# EAGLE board promini_layout (EAGLE 6.5.0)
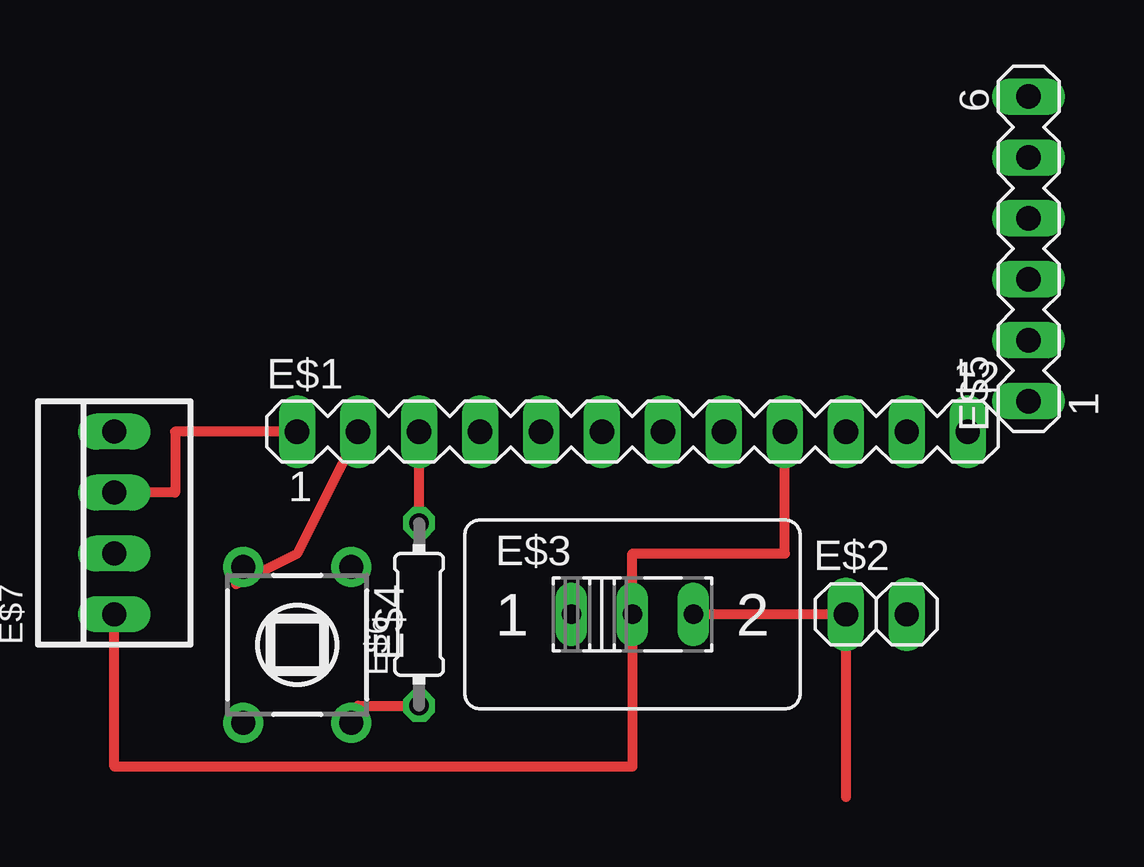
[diagram p0: board, top side]
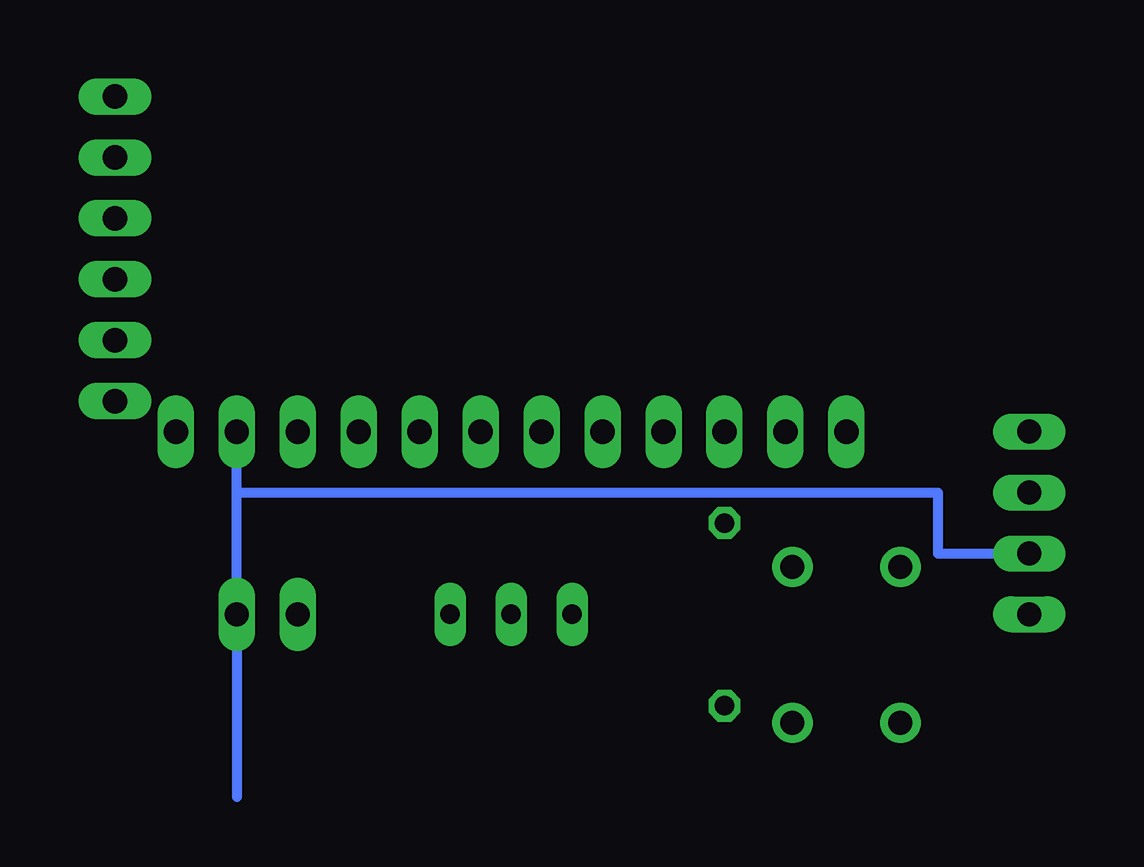
[diagram p1: board, bottom side, seen from below]

No outline drawn. Coordinates in mm, seen from the top.
Copper layers (1*16): Top 0.035mm / dielectric 1.5mm / Bottom 0.035mm
Design rules "default": minimum track width 10mil, minimum drill 24mil, track to track 8mil, track to pad 8mil, pad to pad 8mil, via to via 8mil, smd to smd 8mil, copper to edge 40mil, drill to drill 8mil, minimum pad ring 10mil, minimum via ring 8mil, stop-mask expansion 4mil, vias tented up to drill 0mil, thermal gap 10mil

## Footprints (pad centres in the part's own frame; a part is rotated, then mirrored left to right if it is on the bottom)
MA12-1 = drill 1.016 long: 1 -13.97,0; 2 -11.43,0; 3 -8.89,0; 4 -6.35,0; 5 -3.81,0; 6 -1.27,0; 7 1.27,0; 8 3.81,0; 9 6.35,0; 10 8.89,0; 11 11.43,0; 12 13.97,0
1X02 = drill 1.016 long: 1 -1.27,0; 2 1.27,0
M251 = drill 0.813 long: 1 -2.54,0; 2 0,0; 3 2.54,0
TL1105T = drill 1 pad 1.676: 1 -2.25,3.25; 2 2.25,3.25; 3 -2.25,-3.25; 4 2.25,-3.25
MA06-1 = drill 1.016 long: 1 -6.35,0; 2 -3.81,0; 3 -1.27,0; 4 1.27,0; 5 3.81,0; 6 6.35,0
0204/7 = drill 0.813 octagon: 1 -3.81,0; 2 3.81,0
22-23-2041 = drill 1 long: 1 -3.81,0; 2 -1.27,0; 3 1.27,0; 4 3.81,0

## Placement (x,y rotation side)
E$1  [MA12-1]  46.99,60.96 0 top
E$2  [1X02]  57.15,53.34 0 top
E$3  [M251]  46.99,53.34 0 top
E$4  [TL1105T]  33.02,52.07 180 top
E$5  [MA06-1]  63.5,68.58 90 top
E$6  1k  [0204/7]  38.1,53.34 90 top
E$7  [22-23-2041]  25.4,57.15 90 top

## Library data of the parts
E$1 E$5 = con-lstb
E$2 = pinhead
E$3 E$4 = switch
E$6 = eagle-ltspice
E$7 = con-molex

## Nets
S$1: E$1.1 E$7.3
S$2: E$2.1 E$3.3
S$3: E$1.9 E$3.2 E$7.1
S$4: E$1.2
S$5: E$6.1
S$6: E$1.3 E$6.2
S$8: E$1.11 E$2.2 E$7.2

## Tracks (layer width: path | path; a pad name or v marks a point on that pad's centre or on a via)
S$1
  Top 0.406: E$1.1 27.94,60.96 27.94,58.42 E$7.3
S$2
  Top 0.406: E$3.3 E$2.1 55.88,45.72
S$3
  Top 0.406: E$1.9 53.34,55.88 46.99,55.88 E$3.2 46.99,46.99 25.4,46.99 E$7.1
S$4
  Top 0.406: E$1.2 33.02,55.88 30.48,54.61
S$5
  Top 0.406: 35.56,49.53 E$6.1
S$6
  Top 0.406: E$6.2 E$1.3
S$8
  Bottom 0.406: 58.42,58.42 E$2.2 58.42,45.72 | 58.42,58.42 E$1.11 | 58.42,58.42 29.21,58.42 29.21,55.88 E$7.2

## Text on the board
Vias: 10 | 11 | 12 | vcc | gnd
tDocu: Pro mini 3v3 8MHz, atmega328 | Leave room for FTDI serial lead here | data | gnd | vcc | JST 2pin skt | to neopixels | 3-5V in | button | power switch